# Altium PCB UAV1.0.PcbDoc
Units mil, origin at the board's own origin, x right, y up, seen from the top; angles counter-clockwise.
Board outline 3828.26 x 3827.55 mil, 2 copper layers (Top Layer, Bottom Layer); 61 components, 48 nets, 207 pads, 74 vias.
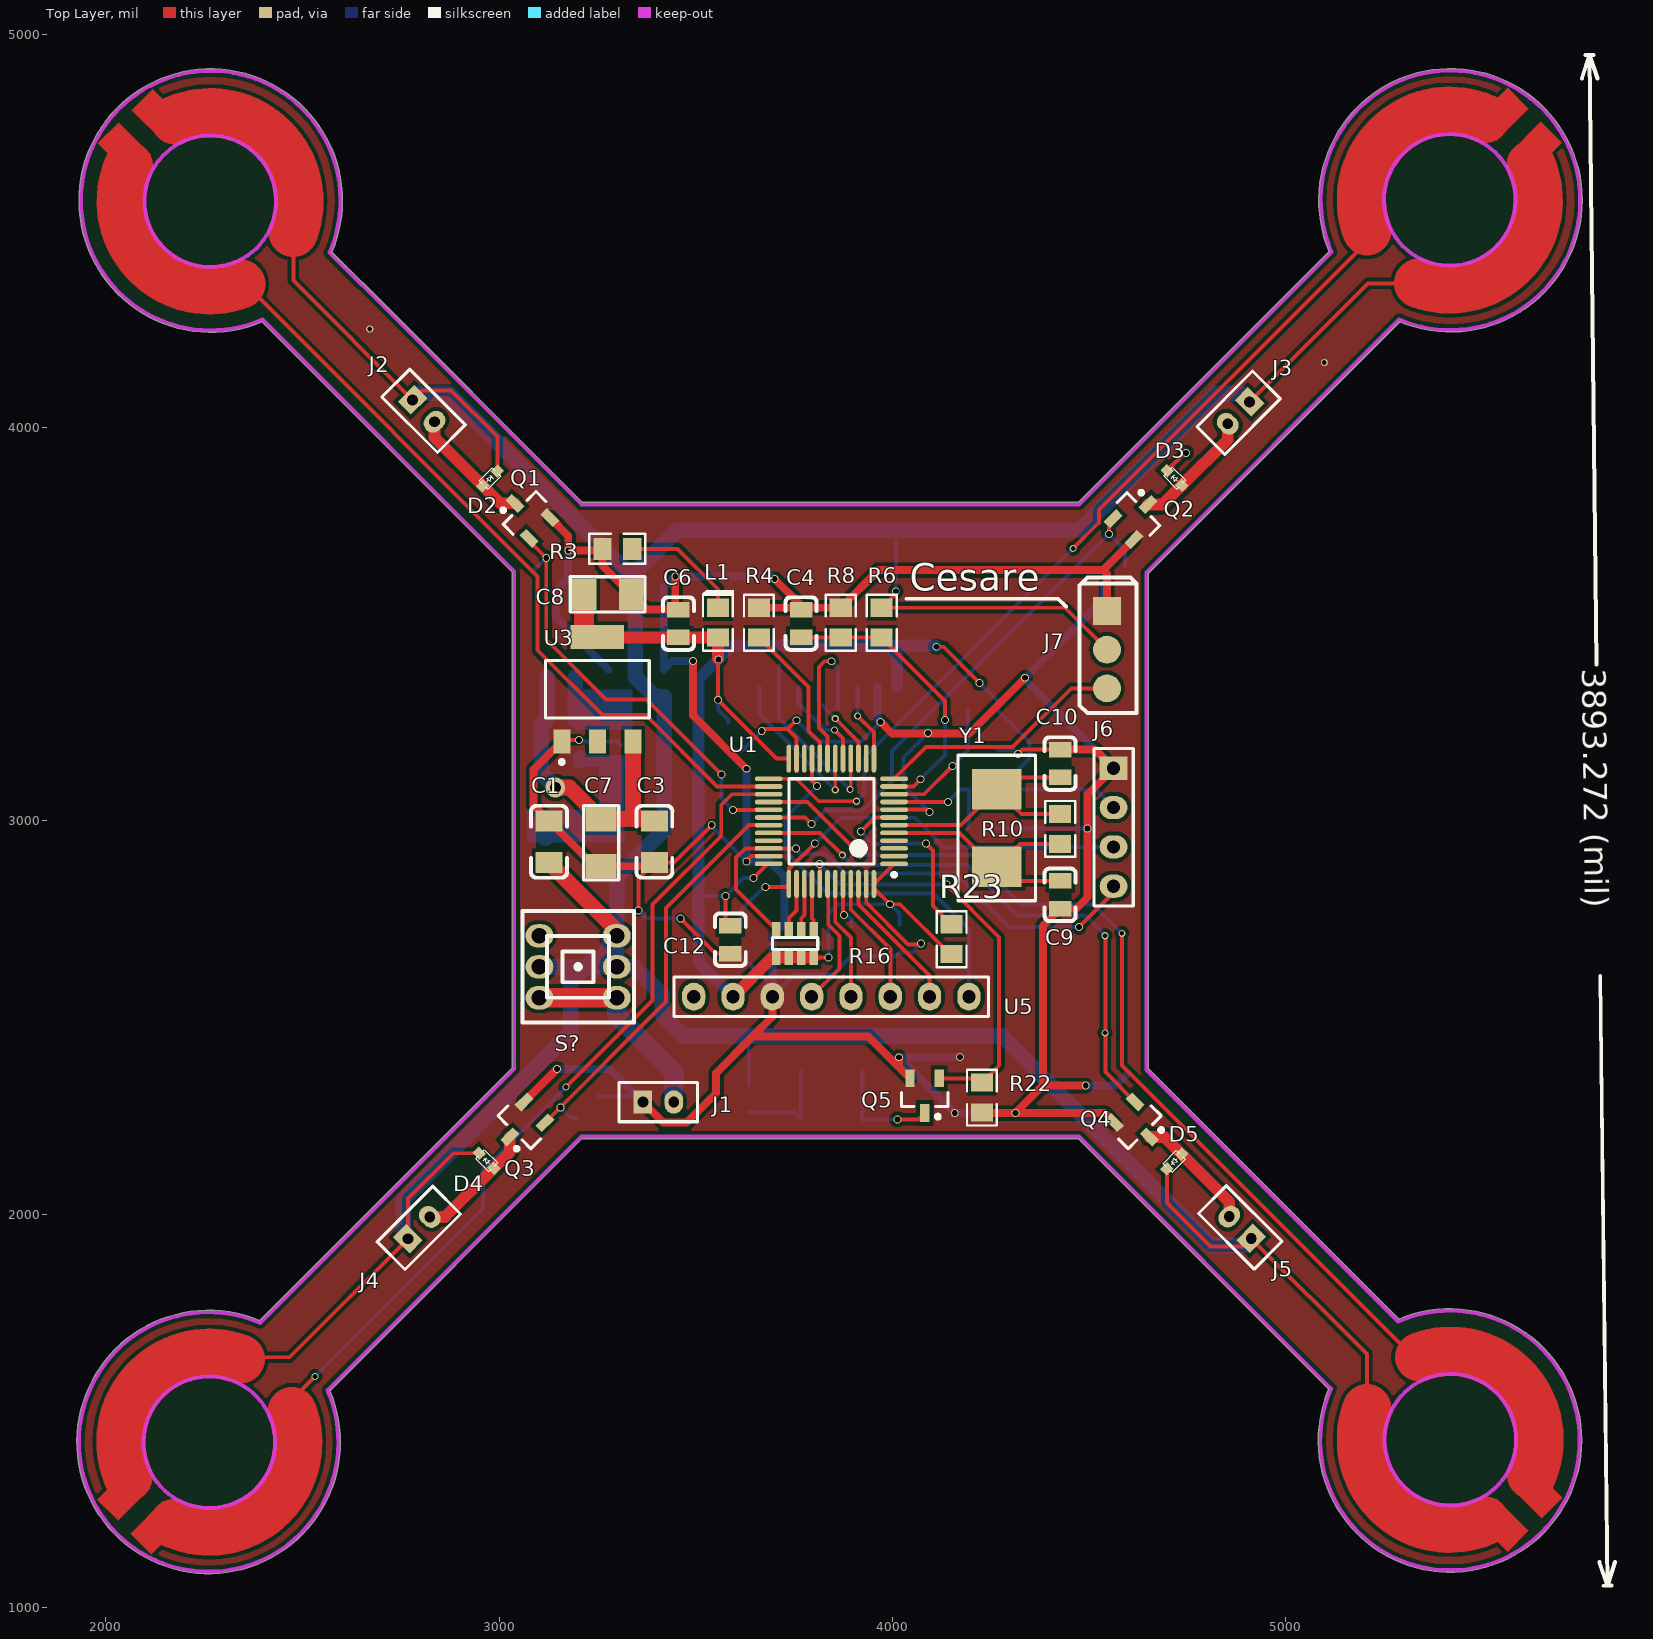
[diagram p0: Top Layer view]
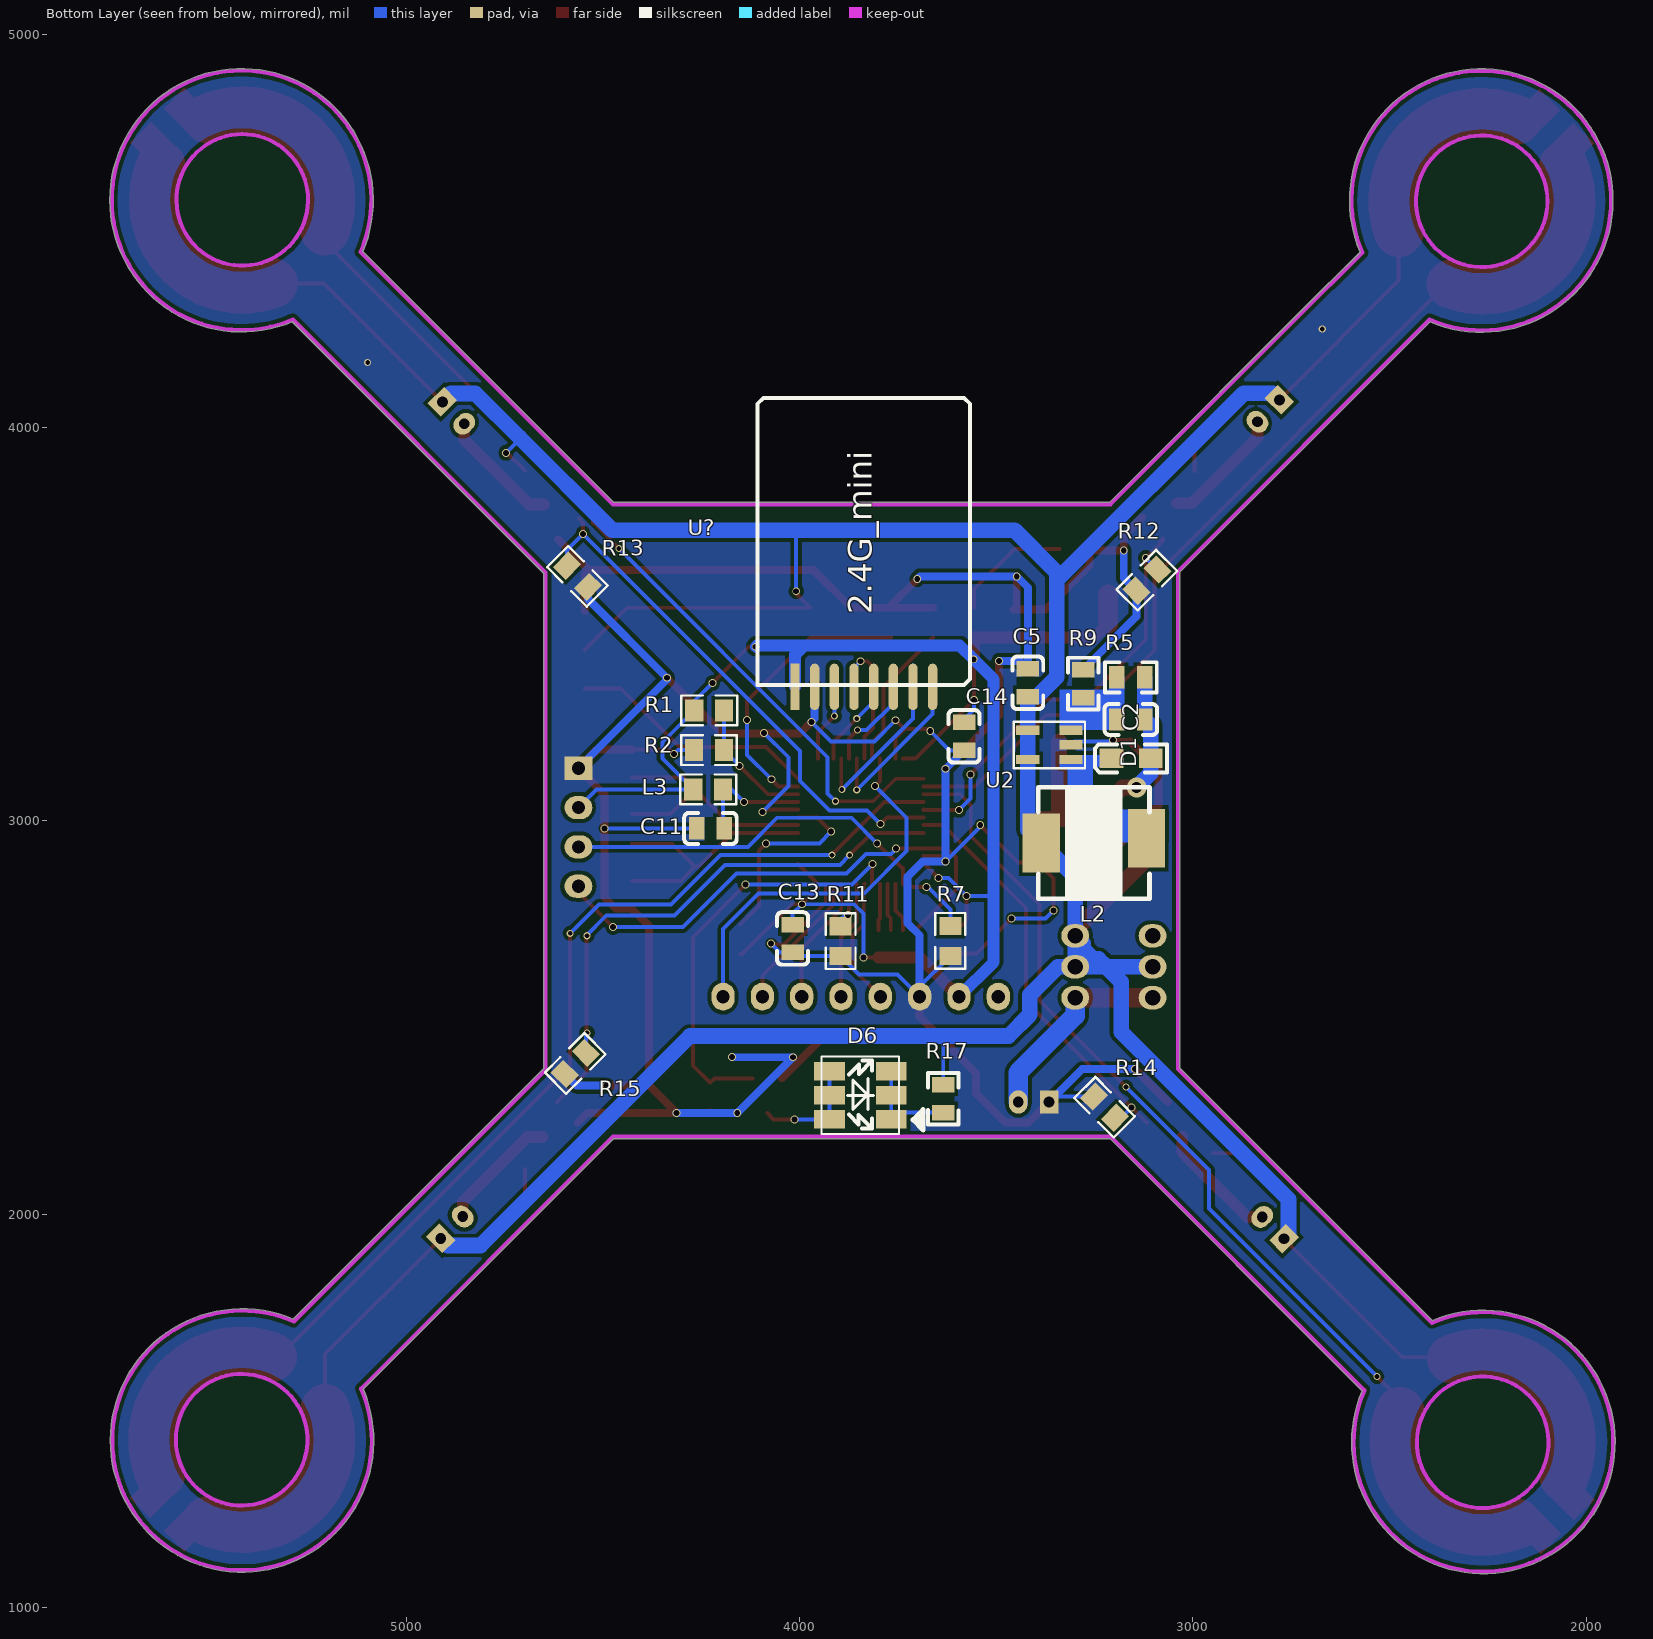
[diagram p1: Bottom Layer view, seen from below]
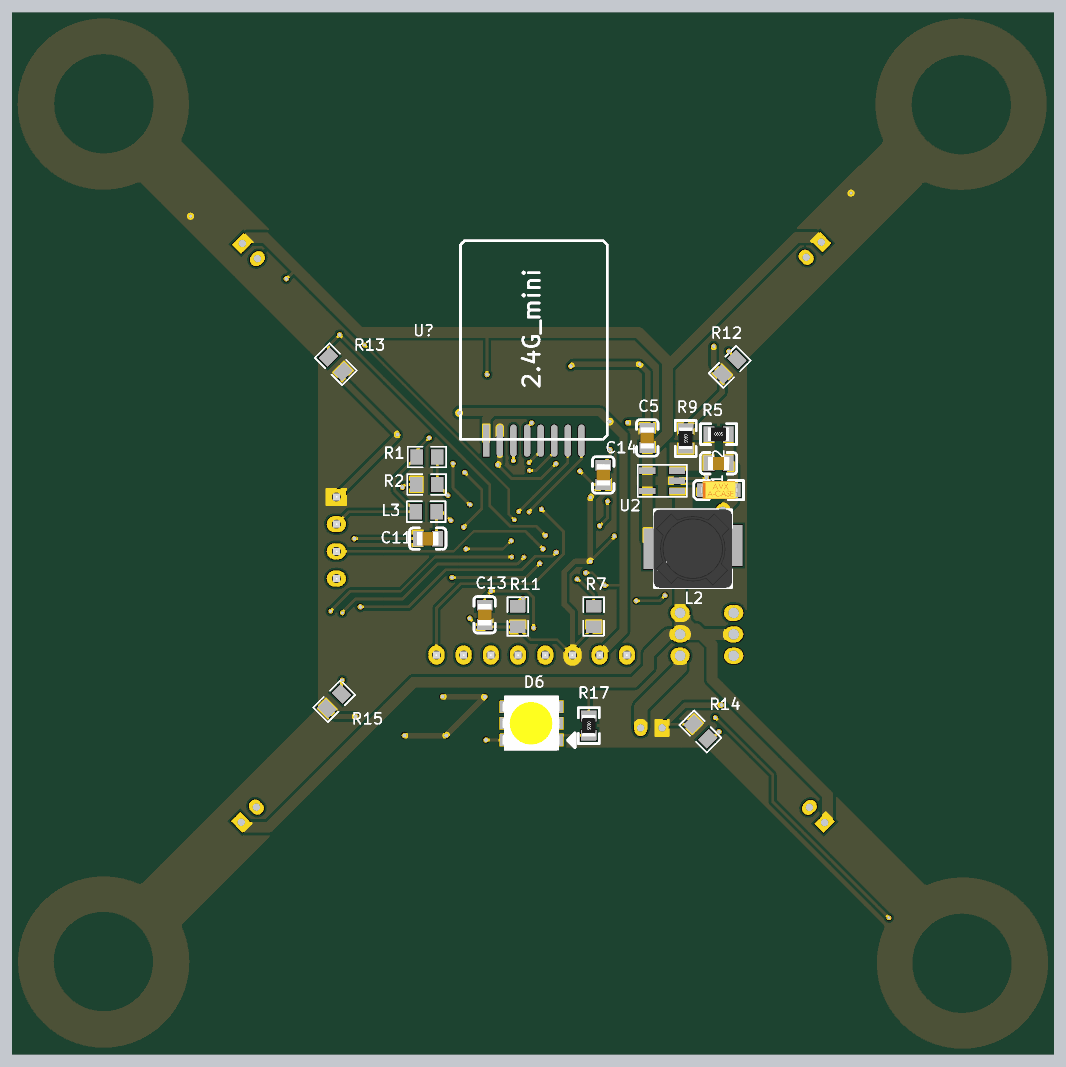
[diagram p2: 3D render of the assembled board from below, using the file's embedded part models]

## Layer stack, top to bottom
Top Solder: solder mask 0.4, Solder Resist, Dk 3.5
Top Layer: signal copper 1.4
Dielectric 1: dielectric 12.6, FR-4, Dk 4.8
Bottom Layer: signal copper 1.4
Bottom Solder: solder mask 0.4, Solder Resist, Dk 3.5

## Board outline
2596.23,1420.56 ccw(c2261.3,1420.56) 2569.88,1550.79 3211.08,2191.99 4472.92,2191.99 5110.01,1554.89 ccw(c5418.44,1424.3) 5753.37,1424.3 ccw(c5418.44,1424.3) 5288.21,1732.88 4651.02,2370.08 4651.02,3629.92 5290.51,4269.42 ccw(c5419.7,4578.44) 5754.64,4578.44 ccw(c5419.7,4578.44) 5111.12,4448.21 4472.92,3810.01 3212.08,3810.01 2653.55,4368.55 2653.56,4368.53 ccw(c2650,4365) 2651.23,4369.86 2574.69,4446.4 ccw(c2266.56,4577.7) 2601.5,4577.7 ccw(c2266.56,4577.7) 2396.79,4269.12 3032.99,3632.92 3032.99,2371.08 2391.19,1729.28 ccw(c2261.3,1420.56)

## Design rules (kind name [scope] priority, off if disabled: settings)
Clearance [All] p1: gap=10
PlaneConnect [All] p1: planeconnectstyle=Direct reliefexpansion=20 reliefentries=4 reliefconductorwidth=10 reliefairgap=10
PolygonConnect PolygonConnect_1 [All vs IsNamedPolygon('Top Layer-No Net')] p1: connectstyle=Direct reliefconductorwidth=10 reliefentries=4 polygonreliefangle="90 Angle" airgapwidth=10
PolygonConnect [All] p2: connectstyle=Direct reliefconductorwidth=10 reliefentries=4 polygonreliefangle="90 Angle" airgapwidth=10
RoutingVias [All] p1: holewidth=12 width=18 viastyle="Through Hole" minholewidth=12 minwidth=18 maxholewidth=28 maxwidth=50
SolderMaskExpansion [All] p1: expansion=4
Width [All] p1: maxlimit=200 minlimit=10 preferedwidth=10
28 further rules are at their usual default settings.

## Components (designator, comment, footprint, x,y, rotation, side; value= is the part's Value field where it differs from the comment)
C1 "Cap Pol1" 1206C 3127,2947 r270 top
C2 "3.3pF" 0805C 3158,3258 r0 bottom
C3 "4.7UF" 1206C 3395,2947 r270 top
C4 "100NF" 0805C 3768.25,3502.06 r90 top
C5 "4.7UF" 0805C 3420,3351 r90 bottom
C6 "0.1UF" 0805C 3456,3502.06 r90 top
C7 "CAPE" CAP_A3216 3294.41,2944.59 r270 top
C8 "CAPE" CAP_A3216 3276,3611 r0 top
C9 "20PF" 0805C 4427,2812 r90 top
C10 "20PF" 0805C 4427,3146 r270 top
C11 "100NF" 0805C 4227,2981 r0 bottom
C12 "100NF" 0805C 3588,2698 r270 top
C13 "100NF" 0805C 4018,2701 r270 bottom
C14 "100NF" 0805C 3582,3215 r270 bottom
D1 "DIODE-S" C_SMA_3216 3157,3159 r180 bottom
D2 "BAT54" SOD-523 2949,3843 r45 top
D3 "BAT54" SOD-523 4746,3844 r135 top
D4 "BAT54" SOD-523 2996,2108 r135 top
D5 "BAT54" SOD-523 4745,2162 r225 top
D6 "LED" LED5050_RGB 3846,2302 r180 bottom
J1 "Li Battery - 3.7V" P2_2.0-1 3405,2285 r180 top
J2 "M1" P2_2.0-1 2808,4043 r135 top
J3 "M1" P2_2.0-1 4881,4038 r45 top
J4 "M1" P2_2.0-1 2796,1965 r225 top
J5 "M1" P2_2.0-1 4885,1966 r315 top
J6 "ST_LINK" P4_2.54-1 4563,2984 r270 top
J7 "External device" 3-pin 4546,3534 r270 top
L1 "白" D0805 3556.74,3467.21 r90 top
L2 "10uH" L_7x7 3252,2944 r0 bottom
L3 "INDUCTOR" R0805 4233,3080 r180 bottom
Q1 "SI2302" SI2302 3071,3776 r135 top
Q2 "SI2302" SI2302 4619,3774 r45 top
Q3 "SI2302" SI2302 3059,2227 r225 top
Q4 "SI2302" SI2302 4623,2228 r315 top
Q5 "SI2302" SI2302 4083,2301 r270 top
R1 "RES" R0805 4230,3281 r0 bottom
R2 "RES" R0805 4231,3180 r180 bottom
R3 "Res1" R0805 3301,3692 r180 top
R4 "RES" R0805 3660.89,3504 r90 top
R5 "620K" 0805R 3158,3365 r180 bottom
R6 "RES" R0805 3973,3504.42 r270 top
R7 "RES" R0805 3617.14,2695 r270 bottom
R8 "RES" R0805 3869.06,3504 r90 top
R9 "200K" 0805R 3279,3349 r270 bottom
R10 "RES" R0805 4427,2980 r270 top
R11 "RES" R0805 3896,2694 r90 bottom
R12 "RES" R0805 3117,3612 r135 bottom
R13 "RES" R0805 4565,3622 r45 bottom
R14 "RES" R0805 3225,2272 r225 bottom
R15 "RES" R0805 4571,2383 r135 bottom
R16 "10k" 8P4R_0603 3752,2688 r90 top
R17 "100R" 0805R 3635,2293.38 r270 bottom
R22 "RES" R0805 4228,2296 r90 top
R23 "RES" R0805 4151,2699 r90 top
S? "SW-DPDT" KEY_KFT7.0 3201,2629 r180 top
U1 "STM32F103C8T6" LQFP48_N 3845.19,2999 r180 top
U2 "TPS6140" SOT-23-5 3310,3156 r0 bottom
U3 "AMS1117" ZZ311 3250,3335 r0 top
U5 "GY_86" P8_2.54-1 3845,2553 r0 top
U? "2.4G" 2.4G_mini 4012,3341 r180 bottom
Y1 "CRYSTAL1" Y2 4266,2982 r270 top

## Footprints (in the part's own frame and the unit in brackets; to place one, negate y for a bottom-side part, rotate by r counter-clockwise, add the part's x,y. Pads: shape width x height; smd on the part's side, far side on the other; paste and mask are expansions set on the pad)
2.4G_mini [mm]
  rect 0.6x3 smd: 1(0,0)
  oval 0.6x3 smd: 2(1.27,0) 3(2.54,0) 4(3.81,0) 5(5.08,0) 6(6.35,0) 7(7.62,0) 8(8.89,0)
  silkscreen extent -2.41,0.13 11.3,18.67
3-pin [mm]
  rect 1.8x1.8 smd: 1(0,0)
  round 1.8 smd: 2(2.5,0) 3(5,0)
  silkscreen extent -2.16,-1.78 6.6,1.91
8P4R_0603 [mil]
  rect 40x21.65 smd: 1(-35,46.5) 2(35,46.5) 3(-35,15) 4(35,15) 5(-35,-16.5) 6(35,-16.5) 7(-35,-47.99) 8(35,-47.99)
  silkscreen extent -15,-59 15,56
0805C [mm]
  rect 1x1.45 smd: 1(-0.9,0) 2(0.9,0)
  Top Layer pour cut-out: -0.432,0.749 -0.432,-0.737 0.406,-0.737 0.406,0.749
  silkscreen extent -1.7,-1 1.7,1, body extent -1,-0.61 1,0.64, height 1
0805R [mm]
  rect 1x1.45 smd: 1(-0.9,0) 2(0.9,0)
  Top Layer pour cut-out: -0.432,0.749 -0.432,-0.737 0.406,-0.737 0.406,0.749
  silkscreen extent -1.68,-0.98 1.68,0.98, body extent -1,-0.62 1,0.63, height 0.5
1206C [mm]
  rect 1.35x1.75 smd: 1(-1.35,0) 2(1.35,0)
  Top Layer pour cut-out: -0.686,0.876 0.673,0.876 0.673,-0.864 -0.686,-0.864
  silkscreen extent -2.32,-1.16 2.32,1.16, body extent -1.65,-0.81 1.55,0.79, height 1
C_SMA_3216 [mil] "英制1206/公制3216"
  rect 60x50 smd: 1(-50,0) 2(50,0)
  Top Layer pour cut-out: -19.68,29.53 19.68,29.53 19.68,-29.53 -19.68,-29.53
  silkscreen extent -93,-35 91,35, body extent -66,-33 68,33, height 67
CAP_A3216 [mil]
  rect 62.99x78.74 smd: 1(-60,-35) 2(60,-35)
  silkscreen extent -95,-80 95,10
D0805 [mil]
  rect 46x56 smd: 1(-1,0) 2(75,0)
  silkscreen extent -34,-40 120,40
KEY_KFT7.0 [mm] "7X7mm"
  oval 1.8x1.5 hole 1: 1(-2.5,2) 2(-2.5,0) 3(-2.5,-2) 4(2.5,-2) 5(2.5,0) 6(2.5,2)
  silkscreen extent -3.6,-3.6 3.6,3.6
L_7x7 [mm]
  rect 2.4x3.8 smd: 1(-3.4,-0.3) 2(3.4,0)
  Top Layer pour cut-out: 3.6,-3.6 -3.6,-3.6 -3.637,3.688 3.6,3.6
  silkscreen extent -3.6,-3.6 3.6,3.6, body extent -3.63,-3.65 3.67,3.65, height 4.5
LED5050_RGB [mm]
  rect 2x1.2 smd paste-0.05 mask+0.05: 1(-2,1.55) 2(-2,0) 3(-2,-1.55) 4(2,-1.55) 5(2,0) 6(2,1.55)
  silkscreen extent -2.51,-2.49 4.06,2.51, body extent -2.68,-2.5 2.62,2.5, height 1.6
LQFP48_N [mm]
  oval 1.8x0.3 smd: 1(-4.05,2.75) 2(-4.05,2.25) 3(-4.05,1.75) 4(-4.05,1.25) 5(-4.05,0.75) 6(-4.05,0.25) 7(-4.05,-0.25) 8(-4.05,-0.75) 9(-4.05,-1.25) 10(-4.05,-1.75) 11(-4.05,-2.25) 12(-4.05,-2.75) 25(4.05,-2.75) 26(4.05,-2.25) 27(4.05,-1.75) 28(4.05,-1.25) 29(4.05,-0.75) 30(4.05,-0.25) 31(4.05,0.25) 32(4.05,0.75) 33(4.05,1.25) 34(4.05,1.75) 35(4.05,2.25) 36(4.05,2.75)
  oval 0.3x1.8 smd: 13(-2.75,-4.05) 14(-2.25,-4.05) 15(-1.75,-4.05) 16(-1.25,-4.05) 17(-0.75,-4.05) 18(-0.25,-4.05) 19(0.25,-4.05) 20(0.75,-4.05) 21(1.25,-4.05) 22(1.75,-4.05) 23(2.25,-4.05) 24(2.75,-4.05) 37(2.75,4.05) 38(2.25,4.05) 39(1.75,4.05) 40(1.25,4.05) 41(0.75,4.05) 42(0.25,4.05) 43(-0.25,4.05) 44(-0.75,4.05) 45(-1.25,4.05) 46(-1.75,4.05) 47(-2.25,4.05) 48(-2.75,4.05)
  silkscreen extent -4.18,-2.75 2.75,3.57
P2_2.0-1 [mm]
  rect 1.2x1.5 hole 0.7: 1(1,0)
  oval 1.2x1.5 hole 0.7: 2(-1,0)
  silkscreen extent -2.54,-1.27 2.54,1.27
P4_2.54-1 [mm]
  rect 1.5x1.8 hole 0.85: 1(-3.81,0)
  oval 1.5x1.8 hole 0.85: 2(-1.27,0) 3(1.27,0) 4(3.81,0)
  silkscreen extent -5.08,-1.27 5.08,1.27, body extent -5.08,-1.47 5.08,1.45, height 8.56
P8_2.54-1 [mm]
  oval 1.5x1.8 hole 0.85: 1(-8.89,0) 2(-6.35,0) 3(-3.81,0) 4(-1.27,0) 5(1.27,0) 6(3.81,0) 7(6.35,0) 8(8.89,0)
  silkscreen extent -10.16,-1.27 10.16,1.27, body extent -10.16,-1.47 10.16,1.45, height 8.56
R0805 [mil]
  rect 46x56 smd: 1(-37.79,0.07) 2(38.21,0.07)
  silkscreen extent -71,-38 71,38
SI2302 [mm]
  rect 1.15x0.6 smd: 1(-1.128,0.934) 2(-1.128,-0.966) 3(1.122,-0.016)
  silkscreen extent -0.2,-1.52 1.47,1.48, body extent -0.7,-1.52 0.7,1.48, height 1.1
SOD-523 [mm]
  rect 0.65x0.6 smd: 1(0.33,0) 2(1.68,0)
  silkscreen extent 0.4,-0.4 1.6,0.4
SOT-23-5 [mm]
  rect 1.5x0.6 smd: 1(0,0) 2(0,-0.95) 3(0,-1.9) 4(2.8,-1.9) 5(2.8,0)
  silkscreen extent -0.9,-2.45 3.7,0.55
Y2 [mm]
  rect 2.6x3.2 smd: 1(-2.5,0) 2(2.5,0)
  silkscreen extent -4.7,-2.5 4.7,2.5
ZZ311 [mm]
  rect 1.1x1.55 smd: 1(-2.3,-3.375) 2(0,-3.375) 3(2.3,-3.375)
  rect 3.45x1.55 smd: 4(0,3.375)
  silkscreen extent -3.35,-4.82 3.35,1.85

## Part data
C1: "Polarized Capacitor (Radial)"
C2 C3 C4 C5 C6 C9 C10 C11 C12 C13 C14: library part CAP, "Capacitor/小容量电容"
D1: "SCHOTTKEY"
D2 D3 D4 D5: library part "D Schottky", "Schottky Diode"
D6: library part LED_5050RGB
J1 J2 J3 J4 J5: library part SIP2
J6: library part SIP4
J7: library part SIP3
L1: library part LED
L2: library part L
R1 R2 R4 R6 R7 R8 R10 R11 R12 R13 R14 R15 R22 R23: "Semiconductor Resistor"
R3: "Resistor"
R5 R9 R17: library part Res
R16: library part 8P4R_0603, "8P4R_0603"
S?: "Double-Pole, Double-Throw Switch"
U1: "STM32 ARM-based 32-bit MCU with 64 Kbytes Flash, 48-pin LQFP, Industrial Temperature"
U3: "Header, 2-Pin"
U?: library part 2.4G_mini

## Via types
v1: diameter 20, hole 15, Top Layer to Bottom Layer, 57 vias
v2: diameter 18, hole 12, Top Layer to Bottom Layer, 16 vias
v3: diameter 50, hole 28, Top Layer to Bottom Layer, 1 vias

## Nets (pads, with @x,y where several pads share a name; then routed paths per layer and width w, separated by ;. In a path a pad name is that pad's centre, name@x,y a point inside that pad or via, vN(x,y) a via of type N, cw(c..) or ccw(c..) an arc to the next point about the centre after c; other vN are vias at no path point)
2.4_CE: U1.13 U?.3 | length 199.7
  Top Layer w10: v2(3912,3267) 3953,3226 3953,3158.9 U1.13
  Bottom Layer w10: v2(3912,3267) U?.3
2.4_CSN: U1.19 U?.4 | length 405.2
  Top Layer w10: U1.19 3835.34,3214.66 3814,3236 3814,3392 3828,3406 v1(3845,3406)
  Bottom Layer w10: v1(3845,3406) 3862,3389 U?.4 U?.4@3862,3287
2.4_IRQ: U1.18 U?.8 | length 421.4
  Top Layer w10: v2(3855,3079) U1.18
  Bottom Layer w10: U?.8 3662,3272 v2(3855,3079)
2.4_MISO: U1.16 U?.7 | length 469
  Top Layer w10: v2(3893,3080) 3894.4,3081.4 U1.16
  Bottom Layer w10: U?.7@3712,3395 U?.7 3712,3261 v2(3893,3080)
2.4_MOSI: U1.17 U?.6 | length 242.7
  Top Layer w10: v2(3853,3231) 3874.71,3209.29 U1.17
  Bottom Layer w10: U?.6 3762,3299 3830,3231 v2(3853,3231)
2.4_SCK: U1.15 U?.5 | length 224.8
  Top Layer w10: v2(3855,3260) 3914.08,3200.92 U1.15
  Bottom Layer w10: U?.5 3812,3303 v2(3855,3260)
505LED: Q5.1 R22.2 U1.41 | length 1090.3
  Top Layer w10: v1(3815,2890) 3815,2891.68 3815.66,2892.34 U1.41 ; Q5.1 4216.73,2345.41 R22.2 4272,2378.28 4272,2704 v1(4138,2838)
  Bottom Layer w10: v1(3815,2890) 3867,2838 v1(4138,2838)
+3.3V: C6.1 C8.1 C12.1 C13.1 C14.1 J6.2 L1.1 L3.1 R1.2 R16.1 R16.3 R16.5 R16.7 R23.1 U1.1 U1.24 U1.36 U1.48 U3.4 U5.2 U?.1 | length 4580.5
  Top Layer w10: v1@3556.74,3412.26 3556.74,3307.26 3705.55,3158.45 U1.24 ; v1(3576,2809) 3576,2745.43 C12.1 ; v1(3647,2855) 3682.73,2890.73 U1.36 ; R16.7 v1(3838,2653) ; U1.1 U1.48 3953.45,2828.55 v1(3994,2788) 4020,2788 4146.79,2661.21 R23.1 ; v1(4112,3443) 4130,3443 v1(4222,3351)
  Top Layer w30: 3216,3501.87 U3.4 3251.66,3466.21 L1.1 v1@3556.74,3412.26 ; U5.2 3695,2653 R16.1 R16.3 R16.5 R16.7
  Top Layer w50: 3216,3501.87 C8.1
  Bottom Layer w10: 3507,2807 3509,2809 v1(3576,2809) 3622,2855 v1(3647,2855) ; v1(3557,3308) 3557,3283 3582,3258 C14.1 ; v1(3838,2653) 3838,2764 3862,2788 v1(3994,2788) 4018,2764 C13.1 ; v1(4222,3351) 4268.21,3304.79 R1.2 4349,3200.14 4349,3158.28 L3.1 4516.93,3080.07 J6.2
  Bottom Layer w30: U5.2 3507,2641 3507,2807 3507,3360 v1(3558,3411) 3593,3446 3989,3446 ; U?.1 4012,3423 3989,3446 ; v1(4112,3443) 4109,3446 3989,3446
+5.0V: C2.1 C3.1 C7.1 D1.2 R5.2 U3.3 | length 779.9
  Top Layer w40: v3(3143,3085) 3179,3085 C7.1 3390.56,3004.59 C3.1 ; 3340.55,3011.14 U3.3
  Bottom Layer w40: R5.2 C2.1 3107,3242.43 D1.2 3107,3122 v3@3143.59,3085.41 ; v3(3143,3085) v3@3143.41,3085.41
ADC: C4.1 R6.2 R8.1 U1.11 | length 732.5
  Top Layer w10: C4.1 3972.65,3466.63 R6.2 4134,3305.28 v1(4134,3257) ; U1.11 4053.58,3087.58 v1(4072,3106)
  Bottom Layer w10: v1(4072,3106) 4134,3168 v1(4134,3257)
BAT+: C1.2 C5.1 D2.2 D3.2 D4.2 D5.2 J2.1 J3.1 J4.1 J5.1 J7.2 L2.2 R6.1 R17.1 S?.2 S?.3 S?.5 U2.4 U2.5 | length 13471.4
  Top Layer w10: 2342,1631.67 2346.33,1636 2467,1636 J4.1 2768.16,2039.16 2883.77,2154.77 D4.2 ; 2476.67,4497 2476.67,4374.33 J2.1 2804.32,4095 2878,4095 2995.77,3977.23 D2.2 ; v1(4009,3584) 4009,3578.14 R6.1 4439.36,3542.21 J7.2 ; D5.2 4698.23,2028.77 4809,1918 4892.68,1918 J5.1 5207.33,1643.67 5207.33,1505 ; D3.2 4744.46,3936 v1(4747,3936) ; J3.1 5210.33,4367.33 5339,4367.33
  Top Layer w40: C1.2 3299.43,2721.43 S?.3
  Top Layer w125: 2056.56,1331.51 cw(c2263,1421) 2342,1631.67 ; 2176.51,4782.44 cw(c2266,4576) 2476.67,4497 ; 5207.33,1505 ccw(c5418,1426) 5507.49,1219.56 ; 5339,4367.33 ccw(c5418,4578) 5624.44,4667.49
  Bottom Layer w10: R17.1 3635,2451 ; v1(4009,3584) 4009,3739 ; 4713,3975 4713,3970 v1(4747,3936)
  Bottom Layer w40: J4.1 2757,1948.32 2757,2038 3182,2463 3182,2590.32 3220.68,2629 ; J2.1 2797.32,4088 2871,4088 3346,3613 ; S?.5 3220.68,2629 ; C5.1 3396.43,3315.57 3346,3366 3346,3632 3453,3739 4009,3739 4477,3739 4713,3975 4825,4087 4887.68,4087 J3.1 ; C5.1@3420.24,3315.57 U2.4 U2.5 3420.24,2978.38 L2.2 3299.43,2857.57 S?.3 ; J5.1 4894.68,1920 4812,1920 4279,2453 3469,2453 3415,2507 3415,2557 3343,2629 S?.2 ; 3220.68,2629 S?.2 ; 3220.68,2629 3240.37,2648.68 3253.68,2648.68 3279.74,2674.74 3279.74,2688.06 S?.3 ; S?.2 S?.3
GND: C1.1 C3.2 C4.2 C5.2 C6.2 C7.2 C8.2 C9.1 C10.1 C11.2 C12.2 C13.2 C14.2 J1.1 J6.1 J7.1 Q1.2 Q2.2 Q3.2 Q4.2 Q5.2 R2.1 R3.2 R4.2 R7.2 R8.2 R9.1 R11.1 R12.1 R13.1 R14.1 R15.1 R22.1 U1.8 U1.23 U1.35 U1.47 U2.2 U3.1 U5.3 U?.2 | length 12304.2
  Top Layer w10: U3.1 3163.32,3206 v1(3203,3206) ; v1(3355,2772) 3355,2853.85 3385.74,2884.59 C3.2 3444.85,2893.85 v1(3541,2990) ; v1(3461,2752) 3550.43,2662.57 C12.2 ; v1(3629,2897) 3642.42,2910.42 U1.35 ; v1(3668,3229) 3673,3234 3733,3234 ; v1(3756,3256) 3734,3234 3733,3234 ; U1.23 3756.6,3210.4 3733,3234 ; U1.47 3933.77,2792.27 4040.04,2686 4075,2686 v1(4073,2688) ; U1.8 4089.47,3028.53 v1(4095,3023) ; v1@4091,3222 v1(4091,3224) ; v1(4320,3170) 4331.43,3181.43 C10.1
  Top Layer w20: Q3.2 v1(3147.22,2369) ; Q1.2 3176,3724.78 v1(3176,3688) 3258.86,3688 R3.2 3262.79,3649.21 C8.2 3374.51,3537.49 C6.2 3448,3545.49 v1(3448,3622) ; U3.1 3088,3130.68 3088,3039.15 C1.1 3242.56,2884.59 C7.2 C3.2@3385.74,2884.59 ; J1.1 3417.63,2233 3477,2233 3552,2308 3552,2359 3644.5,2451.5 ; v1(3493,3407) 3493,3268.57 v1(3629,3132.57) ; R4.2 C4.2@3768.25,3542.21 ; U5.3 3695,2502 3644.5,2451.5 ; v1(3701,3615) 3768.25,3547.75 C4.2@3768.25,3542.21 ; v1(3970,3252) 4000,3222 4091,3222 4196,3222 v1(4338,3364) ; v1(4017,2399) 4017,2373.38 ; Q5.2 4017,2373.38 ; R22.1 4229.14,2257 v1(4313,2257) ; C10.1 4515.57,3181.43 J6.1 4497,3068 v1(4497,2981) 4497,2806 4467.57,2776.57 C9.1 4383,2732.57 4383,2327 ; v1(4492,2327) 4383,2327 ; J7.1 4546,3628.78 4536.78,3638 ; Q4.2 4540.22,2257 v1(4313,2257) ; Q2.2 4536.78,3638 ; 3644.5,2451.5 3938.88,2451.5 4017,2373.38 ; C4.2@3768.25,3542.21 R8.2 3964.78,3638 4536.78,3638 ; v1(4313,2257) 4383,2327
  Bottom Layer w10: v1(3203,3206) 3203,3202 3301.4,3202 U2.2 ; R14.1 3351.86,2298.77 J1.1 ; v1(3355,2772) 3375,2752 v1(3461,2752) ; v1(3541,2990) 3541,2985 v1(3629,2897) ; C14.2 3618.57,3179.57 v1(3668,3229) ; R7.2 3695,2578.86 U5.3 3751,2609 3848.86,2609 R11.1 4008.64,2656.21 C13.2 4050.57,2665.57 v1(4073,2688) ; v1(3756,3256) 3810,3202 3920,3202 v1(3970,3252) ; v1(4091,3224) 4029,3162 4029,3089 v1(4095,3023) ; C11.2 v1(4497,2981) ; R2.1 4309.93,3180.07 v1(4320,3170)
  Bottom Layer w20: v1(3147.22,2369) 3281.63,2369 J1.1@3351.86,2298.77 ; v1(3176,3688) 3176,3617.56 R12.1 3143.77,3519.66 R9.1 ; v1(3493,3407) 3440.57,3407 C5.2 3419,3385.43 3419,3593 v1(3448,3622) 3694,3622 v1(3701,3615) ; C14.2 v1(3629,3132.57) v1(3629,2897) 3687,2897 3726,2858 3726,2740 3695,2709 U5.3@3695,2578.86 ; U?.2 3962,3260 v1(3970,3252) ; v1(4172,2400) 4171,2399 v1(4017,2399) v1(4159,2257) v1(4313,2257) ; v1(4492,2327) 4568.44,2327 R15.1 ; R13.1 4538.33,3564.33 v1(4338,3364) 4338,3359 J6.1
  other v2: 5099,4166 2671,4251
GY_DRDY: U1.21 U5.8 | length 995.4
  Top Layer w10: U1.21 3795.97,3102.03 v1(3809,3089)
  Bottom Layer w10: v1(3809,3089) 3728,3008 3728,2923 3836,2815 4105,2815 4195,2725 U5.8
GY_FSYNC: U1.45 U5.6 | length 328.2
  Top Layer w10: U1.45 3894.4,2774.6 3995,2674 U5.6
GY_INTA: U1.46 U5.7 | length 361.5
  Top Layer w10: U1.46 3914.08,2787.92 4095,2607 U5.7
GY_SCL: U1.42 U5.4 | length 328.7
  Top Layer w10: U5.4 3866,2624 3866,2707.96 3837.12,2736.83 3837.12,2837.77 U1.42
GY_SDA: U1.43 U5.5 | length 303.1
  Top Layer w10: U1.43 3855.03,2742.97 3895,2703 U5.5
JTCK: J6.3 R7.1 U1.37 | length 1140.6
  Top Layer w10: v1(3678,2832) 3729.37,2832 U1.37 3736.92,2879.92 3739.92,2879.92 v1(3803,2943)
  Bottom Layer w10: R7.1 3617.07,2775.07 3676,2834 v1(3678,2832) ; v1(3803,2943) 3868,3008 4058,3008 4132,2934 J6.3
JTDI: R16.4 U1.38 | length 124.7
  Top Layer w10: R16.4 3737,2753 3756.6,2772.6 U1.38
JTDO: R16.6 U1.39 | length 119.8
  Top Layer w10: R16.6 3768.5,2752.5 3776.29,2760.29 U1.39
JTMS: J6.4 R16.2 U1.34 | length 1333.8
  Top Layer w10: R16.2 3603,2825.5 3603,2907 3626.1,2930.1 U1.34 3685.84,2930 v1(3755,2930) ; v1(4475,2730) 4563,2818 J6.4
  Bottom Layer w10: v1@3753,2931 3768,2916 3831,2916 3881,2866 4161,2866 4297,2730 v1(4475,2730)
JTRST: R16.8 U1.40 | length 118.2
  Top Layer w10: U1.40 3795.97,2752.03 3799.99,2748.01 R16.8
LED_1: U1.25 | length 2748.3
  Top Layer w10: U1.25 3755.73,3107.27 3813,3050 v2(3909,3050) ; v2(4460,3693) 4525.24,3758.24 4525.24,3790.24 5184,4449 5184,4497
  Top Layer w125: 5207.33,4501 cw(c5418,4580) 5507.49,4786.44
  Bottom Layer w10: v2(3909,3050) 3929,3070 3929,3162 v2(4460,3693)
LED_2: U1.27 | length 2652.5
  Top Layer w10: 2473.67,1498 2473.67,1528.67 v2(2532,1587) ; v2(3170,2323) 3390,2543 3390,2787 3565,2962 3565,3040 3592.9,3067.9 U1.27
  Top Layer w125: 2173.51,1212.56 ccw(c2263,1419) 2473.67,1498
  Bottom Layer w10: v2(2532,1587) 2959,2014 2959,2112 v2(3170,2323)
LED_3: U1.28 | length 2937.4
  Top Layer w10: U1.28 3784.79,3048.21 3918,2915 v2(3918,2913) ; v2(4584,2714) 4584,2378 5317.5,1644.5
  Top Layer w125: 5341,1636.67 cw(c5420,1426) 5626.44,1336.51
  Bottom Layer w10: v2(3918,2913) 4201,2913 4327,2787 4511,2787 v2(4584,2714)
LED_4: U1.26 | length 2504
  Top Layer w10: 2330,4352.32 2343,4365.33 ; 2362.5,4357.5 3098,3622 3098,3434 3263,3269 3373,3269 3554.42,3087.58 U1.26
  Top Layer w125: 2057.56,4665.49 ccw(c2264,4576) 2343,4365.33
MOS_1: Q1.1 R12.2 U1.29 | length 1109.8
  Top Layer w10: Q1.1@3084,3711 Q1.1 3076.4,3712.63 v1(3120,3669.04) 3120,3461 3272,3309 3375,3309 v1(3566,3118) ; v1(3595,3028) 3685.21,3028 U1.29
  Bottom Layer w10: R12.2 v1(3120,3669.04) ; v1(3566,3118) 3566,3057 v1(3595,3028)
MOS_2: Q2.1 R13.2 U1.30 | length 1364.1
  Top Layer w10: U1.30 3778.16,3008.84 v1(3795,2992) ; v1(4551,3730) 4551,3758 Q2.1
  Bottom Layer w10: v1(3795,2992) 3829,3026 3924,3026 3999,3101 3999,3178 v1(4551,3730) 4592.07,3688.93 R13.2
MOS_3: Q3.1 R14.2 U1.31 | length 1074.9
  Top Layer w10: Q3.1 3425,2541 3425,2779 3635.16,2989.16 U1.31
  Bottom Layer w10: v1(3156,2271) 3181.97,2245.03 R14.2
MOS_4: Q4.1 R15.2 U1.32 | length 1472.7
  Top Layer w10: U1.32 3816.53,2969.47 v2(3873,2913) ; v2(4541,2708) 4542,2709 4542,2361 Q4.1
  Bottom Layer w10: v2(3873,2913) 3898,2888 4190,2888 4319,2759 4492,2759 v2@4542,2709 ; v2(4541,2461) 4544.03,2457.97 R15.2
NetC2_2: C2.2 R5.1 R9.2 U2.3 | length 197.8
  Bottom Layer w40: R5.1 C2.2 3284.21,3258
NetC9_2: C9.2 R10.2 U1.5 Y1.2 | length 658.1
  Top Layer w10: U1.5 4171.53,2969.47 4257.43,2883.57 Y1.2 ; C9.2 4302.14,2847.43 Y1.2 ; R10.2 4324.21,2941.79 Y1.2
NetC10_2: C10.2 R10.1 U1.6 Y1.1 | length 659.7
  Top Layer w10: U1.6 4174.73,2989.16 Y1.1 ; C10.2 4296.14,3110.57 Y1.1 ; R10.1 4328.64,3017.79 Y1.1
NetC11_1: C11.1 L3.2 U1.9 | length 303.9
  Top Layer w10: U1.9 4004.85,3048 v1(4142,3048)
  Bottom Layer w10: v1(4142,3048) 4174.07,3080.07 L3.2 4194.79,2984.22 C11.1
NetD1_1: D1.1 L2.1 U2.1 | length 33.4
  Bottom Layer w40: L2.1 L2.1@3137.34,2975 ; D1.1 D1.1@3211.41,3154.59
NetD2_1: D2.1 J2.2 Q1.3 | length 314.1
  Top Layer w30: J2.2 2835.84,3974.53 D2.1 3002.69,3807.68 Q1.3
NetD3_1: D3.1 J3.2 Q2.3 | length 311.3
  Top Layer w30: Q2.3 4688.42,3804.79 D3.1 4853.16,3969.53 J3.2
NetD4_1: D4.1 J4.2 Q3.3 | length 310.3
  Top Layer w30: J4.2 2862.47,1992.84 D4.1 3027.32,2157.69 Q3.3
NetD5_1: D5.1 J5.2 Q4.3 | length 309.3
  Top Layer w30: Q4.3 4692.31,2196.32 D5.1 4857.16,2031.47 J5.2
NetD6_1: D6.1 D6.2 D6.3 Q5.3 | length 286.2
  Top Layer w10: v1(4013.02,2240.98) 4066.52,2240.98 Q5.3
  Bottom Layer w10: D6.1 D6.3 v1(4013.02,2240.98)
NetD6_4: D6.4 D6.5 D6.6 R17.2 | length 261.3
  Bottom Layer w10: R17.2 3750.29,2257.94 D6.4 D6.6
NetJ1_2: J1.2 S?.1 S?.6 | length 513.7
  Top Layer w50: S?.6 S?.1@3291,2550.26
  Bottom Layer w50: S?.1 3299.43,2504.57 3444.37,2359.63 J1.2
NetL1_2: L1.2 R3.1 | length 307.5
  Top Layer w10: R3.1 3454.07,3691.93 3556.74,3589.26 L1.2
NetR1_1: R1.1 R2.2 U1.10 | length 335.9
  Top Layer w10: U1.10 4080.9,3067.9 v1(4153,3140)
  Bottom Layer w10: v1(4153,3140) 4153,3140.28 R2.2 4192.21,3180.65 R1.1
NetR4_1: R4.1 U1.20 | length 371.9
  Top Layer w10: R4.1 3786.98,3340.05 3786.98,3228.98 3815.66,3200.3 U1.20
NetR11_2: R11.2 U1.44 | length 120.4
  Top Layer w10: U1.44 3874.71,2763.17 v1(3877.03,2760.86)
  Bottom Layer w10: v1(3877.03,2760.86) 3884.14,2760.86 3896.07,2748.93 R11.2
NetR23_2: R23.2 U1.7 | length 510.6
  Top Layer w10: v1(3920,2973) 3955.84,3008.84 U1.7 ; v1(4086,2943) 4104,2925 4104,2784.14 R23.2
  Bottom Layer w10: v1(3920,2973) 3950,2943 v1(4086,2943)
OUT_1: J7.3 U1.12 | length 636.6
  Top Layer w10: U1.12 4085.37,3188 4306,3188 4455.15,3337.15 J7.3
pads on no net: S?.4 U1.2 U1.3 U1.4 U1.14 U1.22 U1.33 U3.2 U5.1

## Polygon pours and split planes (outlines as drawn)
GND on Top Layer "Top Layer-No Net" (solid, remove dead copper, pour order 2): 1816,5213 1821,5218.64 6025,5218.64 6025,648.31 6057,612.21 5973,706.98 1711,706.98
GND on Bottom Layer "Top Layer-No Net" (solid, remove dead copper, pour order 4): 1432,5570 1615,5753 6195,5753 6195,639 6172,662 1562,662

## Keep-outs
Keep-Out Layer:
  lines w10: 2392.37,1723.37 3038,2369 3038,3635 2399.21,4273.79 ; 2392.46,1723.29 ccw(c2261.3,1420.56) 2563.76,1552.33 ; 2398.54,4275.33 cw(c2266.56,4577.7) 2569.77,4447.67 ; 2564.77,1552.77 3209,2197 4475,2197 5115,1557 ; 2568.05,4445.95 2650.44,4363.56 ; 2649,4365 2650,4365 2764.5,4250.5 3209.5,3805.5 ; 3209,3805 4475,3805 5117.47,4447.47 ; 4646,2366 4646,3632 5289,4275 ; 4647,2367 5286.68,1727.32 ; 5116.16,1556.49 ccw(c5418.44,1424.3) 5286.88,1726.85 ; 5116.46,4448.48 cw(c5419.7,4578.44) 5289.19,4275.43 ; 2372.59,1546.15 ccw(c2263.13,1419.6) 2372.59,1546.15 ; 2392.15,4466.41 ccw(c2265.6,4575.87) 2392.15,4466.41 ; 5292.85,1535.59 ccw(c5419.4,1426.13) 5292.85,1535.59 ; 5308.41,4452.85 ccw(c5417.87,4579.4) 5308.41,4452.85

## Other copper
Top Layer:
  region net BAT+: 5620.5,4642.5 5703.23,4725.23 5649.73,4778.73 5567,4696
  region net LED_1: 5536,4729 5618.73,4811.73 5565.23,4865.23 5482.5,4782.5
  region net LED_3: 5569,1308 5651.73,1225.27 5705.23,1278.77 5622.5,1361.5
  region net BAT+: 5482.5,1223.5 5565.23,1140.77 5618.73,1194.27 5536,1277
  region net LED_4: 2115,4694 2032.27,4776.73 1978.77,4723.23 2061.5,4640.5
  region net BAT+: 2201.5,4778.5 2118.77,4861.23 2065.27,4807.73 2148,4725
  region net LED_2: 2145,1270 2062.27,1187.27 2115.77,1133.77 2198.5,1216.5
  region net BAT+: 2060.5,1356.5 1977.77,1273.77 2031.27,1220.27 2114,1303
Bottom Layer:
  rectangle net NetC2_2: 3195,3231 3339,3334
  rectangle net NetD1_1: 3189,3137 3339,3168
  rectangle net NetD1_1: 3254,2945 3319,3137
  rectangle net NetD1_1: 3071,2945 3254,3029

## Silkscreen, mask and mechanical layers (free items; w line width, h text height)
Top Overlay:
  lines w10: 4036,3565 4422,3565 4442,3545 ; 5753.71,4887.77 5773,4948 ; 5763,4947.88 5783,4948.12 ; 5791.32,3397.35 5773,4948 ; 5793.71,4888.24 5773,4948 ; 5798.29,1114.76 5819,1055 ; 5800.68,2605.65 5819,1055 ; 5809,1054.88 5829,1055.12 ; 5838.29,1115.23 5819,1055
  text "Cesare" at 4044,3586 h70
  text "3893.272 (mil)" at 5755.45,3386.92 h60 r270.68
Top Solder:
  region: 2114.5,4694.5 2031.77,4777.23 1978.27,4723.73 2061,4641
  region: 2201.5,4778.5 2118.77,4861.23 2065.27,4807.73 2148,4725
  region: 5536.5,4729.5 5619.23,4812.23 5565.73,4865.73 5483,4783
  region: 5621.5,4643.5 5704.23,4726.23 5650.73,4779.73 5568,4697
  region: 5569.5,1307.5 5652.23,1224.77 5705.73,1278.27 5623,1361
  region: 5482.5,1223.5 5565.23,1140.77 5618.73,1194.27 5536,1277
  region: 2144.5,1269.5 2061.77,1186.77 2115.27,1133.27 2198,1216
  region: 2060.5,1356.5 1977.77,1273.77 2031.27,1220.27 2114,1303

## Dimensions
5773,4931 to 1915,4942 on Top Overlay

## Text inside footprints (layer, text, board x,y; h text height)
U?: Bottom Overlay "2.4G_mini" at 3817,3526 h60 r270